# EAGLE board s-tuner_prototype_orig (EAGLE 6.1)

Size 42.93 x 26.97 mm. Coordinates in mm from the lower left corner, seen from the top.
Outline: 0,0 42.9,0 42.93,26.98 0,26.98 0,0
Copper layers (1*16): Top 0.035mm / dielectric 1.5mm / Bottom 0.035mm
Design rules: minimum track width 8mil, minimum drill 24mil, track to track 8mil, track to pad 8mil, pad to pad 8mil, via to via 8mil, smd to smd 8mil, copper to edge 40mil, drill to drill 8mil, minimum pad ring 10mil, minimum via ring 8mil, stop-mask expansion 4mil, vias tented up to drill 0mil, thermal gap 10mil
bKeepout: area 24.6,2.3 to 45.2,22.9
tRestrict: area 17.9,13.7 to 20.7,17.7
bRestrict: area 17.9,13.7 to 20.7,17.7

## Footprints (pad centres in the part's own frame; a part is rotated, then mirrored left to right if it is on the bottom)
BATT-HDR-FB = smd 5.08 x 2.54: P$1 7.62,0; P$2 7.62,22.479 | smd 10.16 x 10.16: P$3 7.62,11.811
C0603 = smd 1.1 x 1: 1 -0.85,0; 2 0.85,0
SML0805 = smd 1.2 x 1.2: A 1.05,0; C -1.05,0
LED3MM = drill 0.813 octagon: A -1.27,0; K 1.27,0
R0603 = smd 1 x 1.1: 1 -0.85,0; 2 0.85,0
POLYCASE_FINGER_TRACE = smd 1.27 x 0.635: P$1 0,0; P$2 2.54,0; P$3 5.08,0; P$4 5.08,5.08; P$5 2.54,5.08; P$6 0,5.08
PW14 = smd 0.3 x 1.2: 1 -1.95,-2.9; 2 -1.3,-2.9; 3 -0.65,-2.9; 4 0,-2.9; 5 0.65,-2.9; 6 1.3,-2.9; 7 1.95,-2.9; 8 1.95,2.9; 9 1.3,2.9; 10 0.65,2.9; 11 0,2.9; 12 -0.65,2.9; 13 -1.3,2.9; 14 -1.95,2.9
MICROCRYSTAL_32K = smd 1.778 x 0.914: P$1 7.518,3.15; P$2 7.518,0.483 | smd 1.27 x 2.54: P$3 0.965,1.88
PROGRAMMING_HEADER = smd 1.27 x 0.635: P$2 0,0; P$3 0,1.27; P$4 0,2.54; P$5 0,3.81; P$6 0,5.08

## Placement (x,y rotation side)
BATT1  [BATT-HDR-FB]  27.43,24.77 180 bottom
C1  10uF/10V  [C0603]  25.65,1.4 0 bottom
C2  100nF  [C0603]  24.88,23.74 180 bottom
C3  100nF  [C0603]  23.4,4.74 180 bottom
C4  100nF  [C0603]  13.13,1.81 0 bottom
C5  10nF  [C0603]  12.78,24.44 0 bottom
LED1  [SML0805]  4.7,24.38 90 top
LED2  [SML0805]  4.7,20.07 90 top
LED3  [SML0805]  4.7,15.49 90 top
LED4  [SML0805]  4.7,10.92 90 top
LED5  [SML0805]  4.7,6.48 90 top
LED6  [SML0805]  4.7,2.29 90 top
LED7  [LED3MM]  2.16,16.64 270 top
LED8  [LED3MM]  2.16,10.29 90 top
R1  1500  [R0603]  12.52,8.7 0 bottom
R2  1500  [R0603]  12.19,23.24 270 top
R3  1500  [R0603]  12.48,4.28 180 top
R4  270  [R0603]  16.18,4.47 180 top
R5  270  [R0603]  17.98,1.9 180 top
R6  47k  [R0603]  18.69,24.58 0 bottom
R7  47k  [R0603]  17.51,1.95 0 bottom
R8  47k  [R0603]  22.08,1.29 0 bottom
SW1  [POLYCASE_FINGER_TRACE]  26.75,10.95 90 top
SW2  [POLYCASE_FINGER_TRACE]  13.54,10.95 90 top
U1  G2X[0/1]1---PW14  [PW14]  19.05,7.49 180 top
U$2  MICROCRYSTAL_32K  [MICROCRYSTAL_32K]  21.04,20.3 270 bottom
U$3  PROGRAMMING_HEADER  [PROGRAMMING_HEADER]  16.38,22.1 90 bottom

## Library data of the parts
BATT1 SW1 SW2 U$2 U$3 = applied-knowledge
C1-C5 R1-R8 = resistor
LED1-LED8 = led
U1 = TI_MSP430_v16

## Nets
GND: BATT1.P$3 C1.2 C2.2 C3.2 C4.2 C5.2 SW1.P$1 SW1.P$2 SW1.P$3 SW2.P$1 SW2.P$2 SW2.P$3
N$1: U$2.P$1
N$2: C5.1 R6.2 U$3.P$2
N$3: C4.1 R7.2 SW2.P$4 SW2.P$5 SW2.P$6
N$5: U$2.P$2
N$6: R1.1
N$9: R3.1
N$10: R4.1 U$3.P$3
N$11: R1.2
N$12: R4.2
N$13: R5.1 U$3.P$5
N$14: C3.1 R8.2 SW1.P$4 SW1.P$5 SW1.P$6
N$16: U$3.P$4
N$17: BATT1.P$1 BATT1.P$2 C1.1 C2.1 R6.1 R7.1 R8.1 U$3.P$6
N$19: R5.2
S$1: R2.1

## Tracks (layer width: path | path; a pad name or v marks a point on that pad's centre or on a via)
GND  (9 unrouted)
N$2  (2 unrouted)
N$3  (2 unrouted)
N$10  (1 unrouted)
N$13  (1 unrouted)
N$14  (2 unrouted)
N$17  (7 unrouted)